# EAGLE board circle_uv (EAGLE 7.4.0)
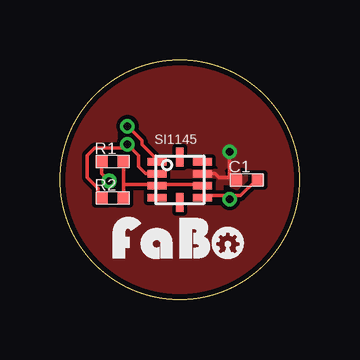
[diagram p0: board, top side]
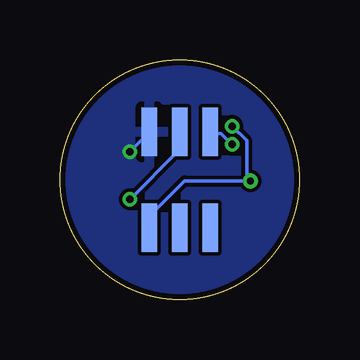
[diagram p1: board, bottom side, seen from below]

Size 10 x 10 mm. Coordinates in mm from the lower left corner, seen from the top.
Copper layers (1*16): Top 0.035mm / dielectric 1.5mm / Bottom 0.035mm
Design rules "SeeedStudio_2layer_DRU_no_angle_20140221": minimum track width 6mil, minimum drill 12mil, track to track 6mil, track to pad 6mil, pad to pad 6mil, via to via 6mil, smd to smd 0mil, copper to edge 10mil, drill to drill 10mil, minimum pad ring 10mil, minimum via ring 6mil, stop-mask expansion 2mil, vias tented up to drill 100mil, thermal gap 10mil

## Footprints (pad centres in the part's own frame; a part is rotated, then mirrored left to right if it is on the bottom)
0402 = smd 0.5 x 0.5: P$1 -0.46,0; P$2 0.46,0
SILICONLABS-SI1145 = smd 0.8 x 0.3: 1 -0.95,0.752; 2 -0.95,0.252; 3 -0.95,-0.248; 4 -0.95,-0.748; 6 0.95,-0.748; 7 0.95,-0.248; 8 0.95,0.252; 9 0.95,0.752 | smd 0.3 x 0.8: 5 0,-0.95; 10 0,0.95
FABO-NANO = smd 0.635 x 2.032 bottom: 0 -1.27,2; 1 1.27,-2; 2 0,-2; 3 -1.27,-2; GND 1.27,2; VCC 0,2

## Placement (x,y rotation side)
C1  0.1uf  [0402]  7.79,5 0 top
R1  4.7K  [0402]  2.21,5.76 0 top
R2  4.7K  [0402]  2.21,4.24 0 top
SI1145  SL-SI1145  [SILICONLABS-SI1145]  5,5 0 top
U$2  FABO-NANO  [FABO-NANO]  5,5 0 top
U$3  [LOGO_FABO_S]  5,1.7 0 top

## Library data of the parts
C1 = FaBo-Capacitor
R1 R2 = FaBo-Resistors
SI1145 = FaBo-Mems
U$2 = FaBo-Template
U$3 = FaBo-etc

## Nets
3V3: C1.P$2 R1.P$2 R2.P$2 SI1145.3 SI1145.6 SI1145.7 U$2.VCC
GND: C1.P$1 SI1145.8 U$2.GND
SCL: R2.P$1 SI1145.2 U$2.0
SDA: R1.P$1 SI1145.1 U$2.1

## Tracks (layer width: path | path; a pad name or v marks a point on that pad's centre or on a via)
3V3  (via drill 0.3)
  Top 0.152: 2.66,4.8 2.66,5.71 R1.P$2 | 2.66,4.8 2.66,4.34 R2.P$2 | 2.66,4.8 4.04,4.8 SI1145.3 4.19,4.8 5.86,4.8 SI1145.7 6.02,4.64 6.02,4.34 | 6.02,4.34 7.08,4.34 | 7.08,4.34 7.54,4.34 8.15,4.95 C1.P$2 | 6.02,4.34 SI1145.6 | 7.08,4.34 v7.08,4.19
  Bottom 0.152: v7.08,4.19 5.1,6.17 5.1,6.93 U$2.VCC
GND  (via drill 0.3)
  Top 0.152: 7.08,5.1 6.63,5.1 6.47,5.25 6.02,5.25 SI1145.8 | 7.08,5.1 7.24,5.1 C1.P$1 | v7.08,6.17 7.08,5.1
  Bottom 0.152: v7.08,6.17 6.32,6.93 U$2.GND
  pour Top: -0.08,-0.08 10.08,-0.08 10.08,10.08 -0.08,10.08
  pour Bottom: -0.08,-0.08 10.08,-0.08 10.08,10.08 -0.08,10.08
SCL  (via drill 0.3)
  Top 0.152: 2.82,6.32 2.97,6.32 3.27,6.02 3.27,5.56 3.58,5.25 4.04,5.25 SI1145.2 | 2.82,6.32 1.44,6.32 1.14,6.02 1.14,5.1 1.6,4.64 1.6,4.34 R2.P$1 | 2.82,6.32 v2.82,6.47
  Bottom 0.152: v2.82,6.47 3.27,6.93 3.73,6.93 U$2.0
SDA  (via drill 0.3)
  Top 0.152: v2.05,4.95 1.75,5.25 1.75,5.71 R1.P$1 | v2.82,7.24 3.42,6.63 3.42,6.47 4.04,5.86 SI1145.1
  Bottom 0.152: 2.21,4.95 4.8,4.95 6.17,3.58 6.17,3.12 U$2.1 | v2.82,7.24 2.21,6.63 2.21,4.95 | 2.21,4.95 v2.05,4.95